# Altium PCB Arduino_ESP8266_SHT21_BH1750.PcbDoc
Units mm, origin at the board's own origin, x right, y up, seen from the top; angles counter-clockwise.
Board outline 48.85 x 51.82 mm, 2 copper layers (Top Layer, Bottom Layer); 10 components, 29 nets, 56 pads, 1 vias.
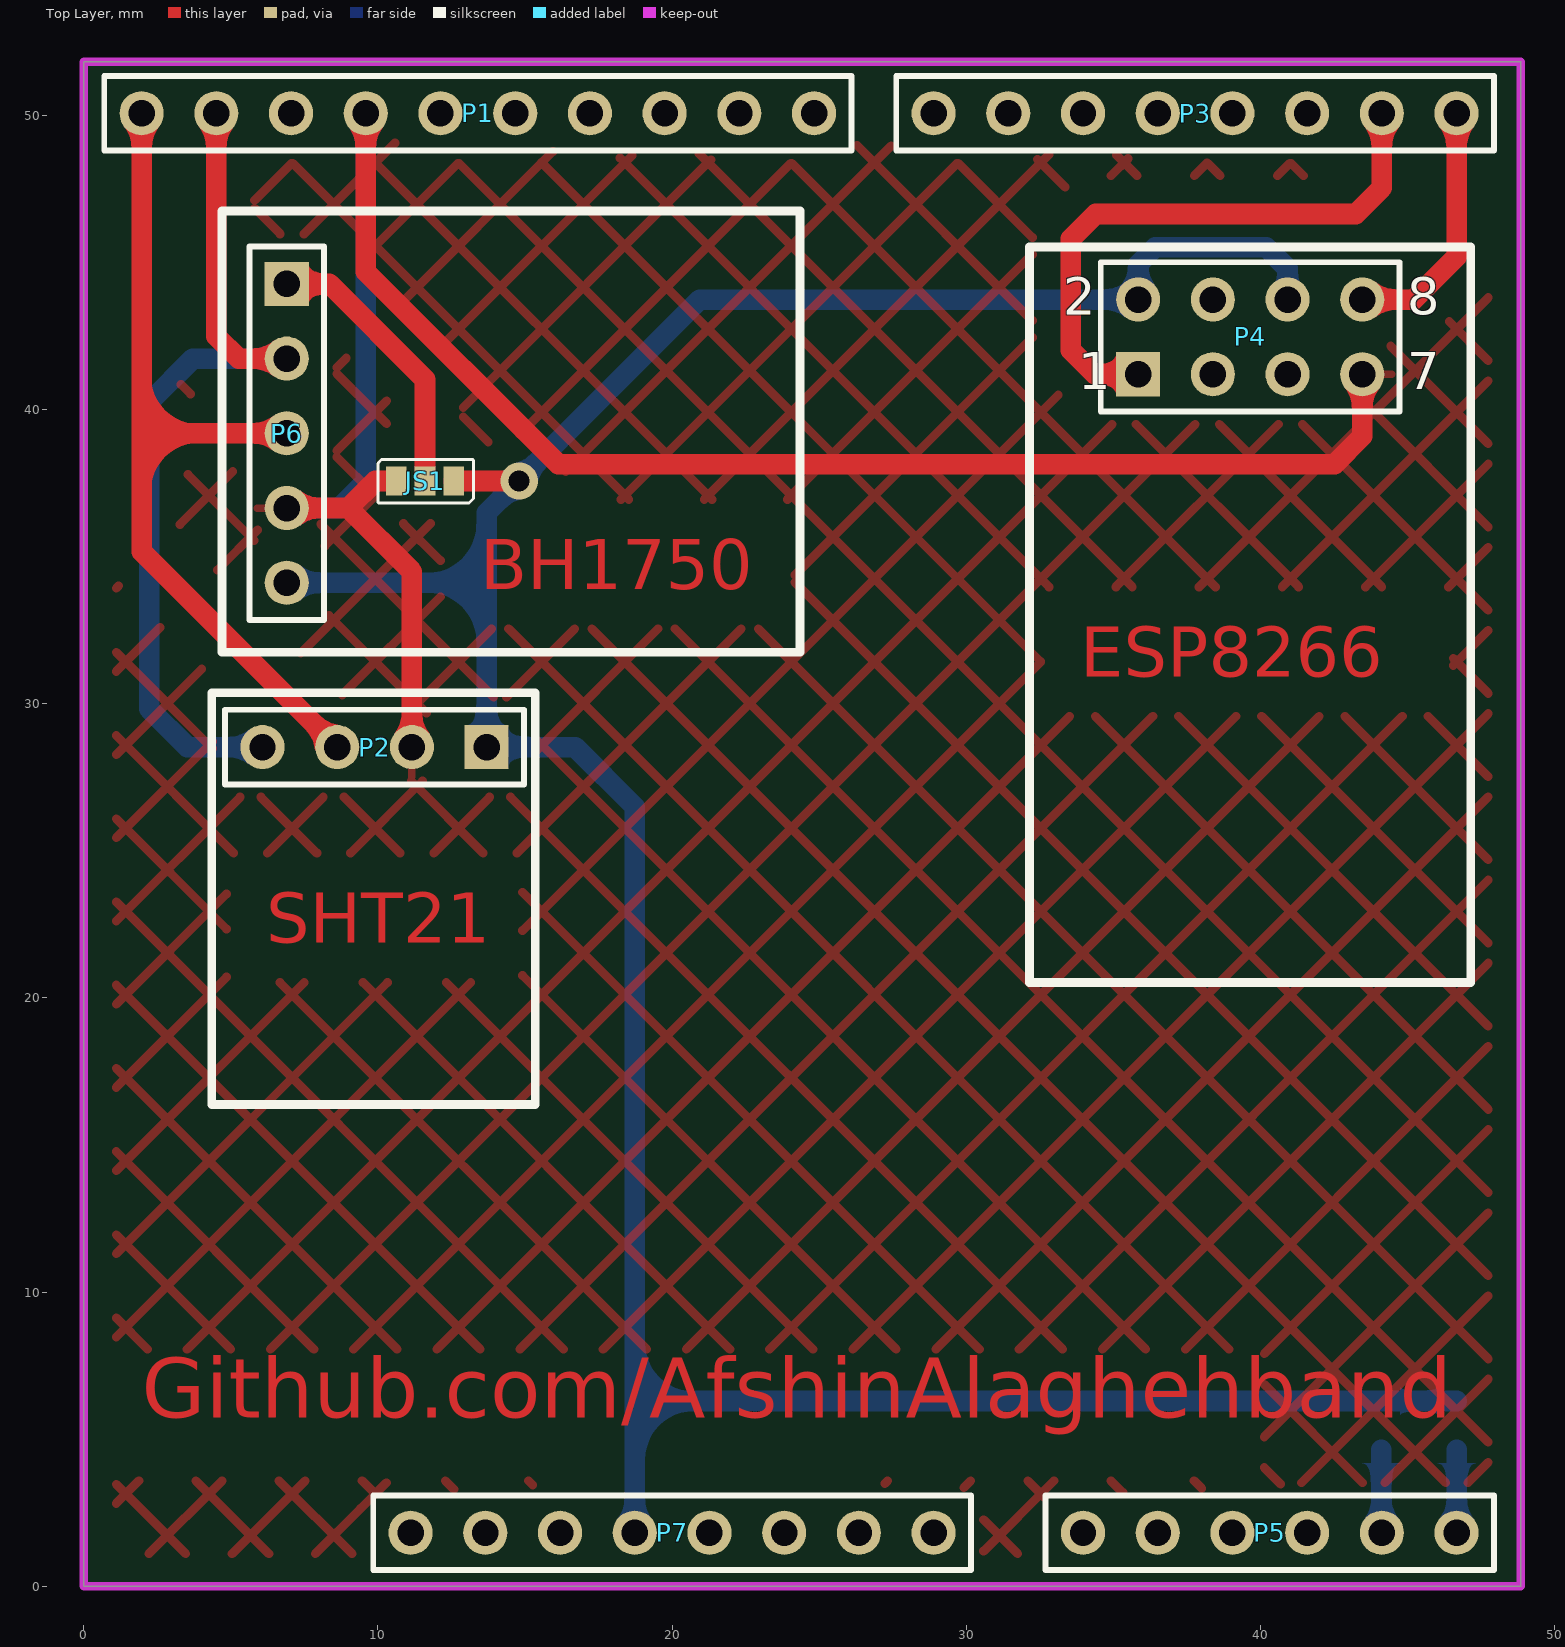
[diagram p0: Top Layer view]
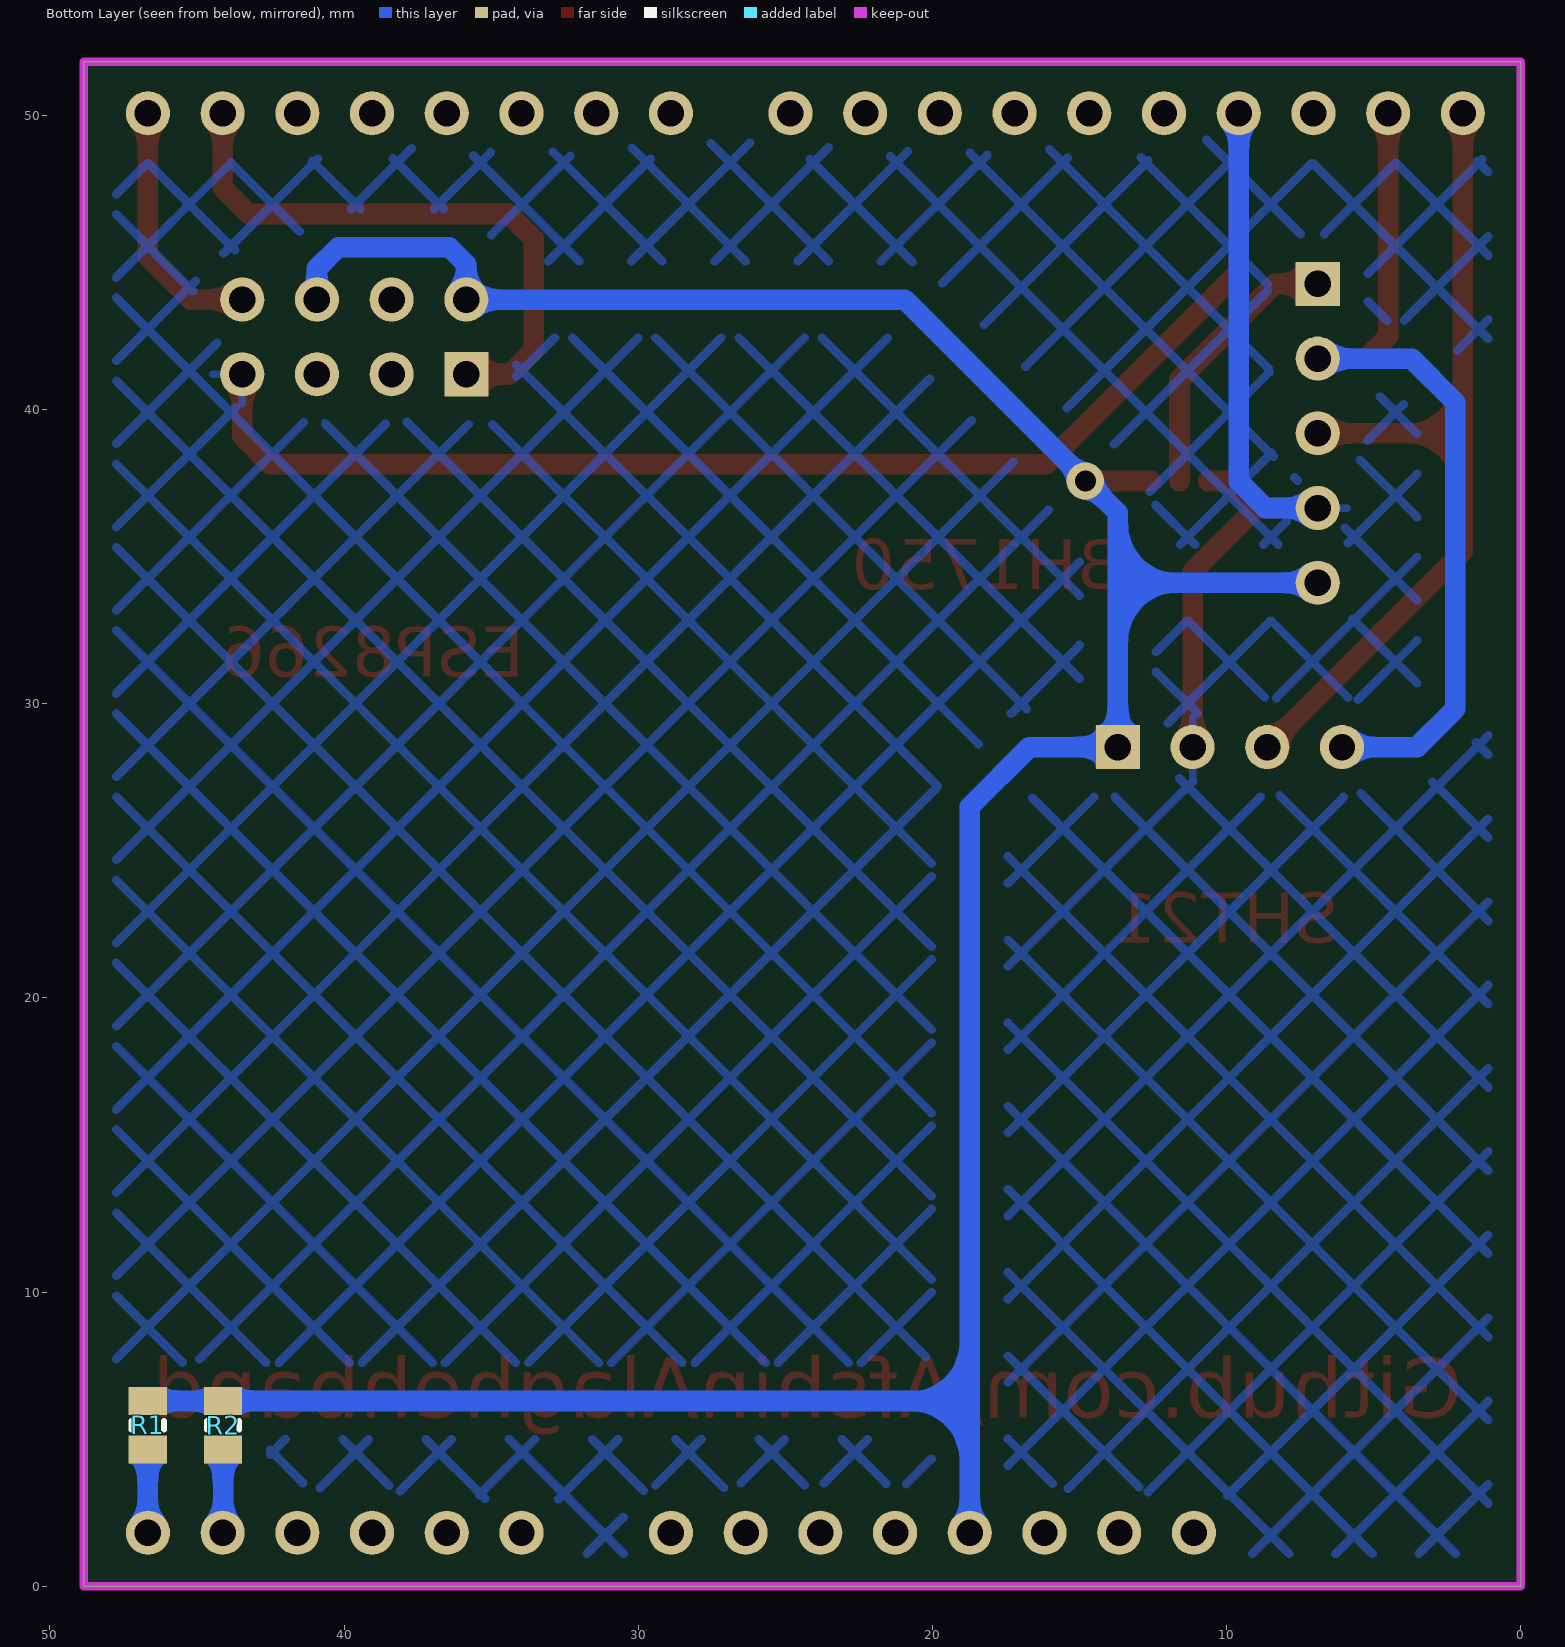
[diagram p1: Bottom Layer view, seen from below]

## Layer stack, top to bottom
Top Solder: solder mask 0.0102, Solder Resist, Dk 3.5
Top Layer: signal copper 0.0356
Dielectric 1: dielectric 0.32, FR-4, Dk 4.8
Bottom Layer: signal copper 0.0356
Bottom Solder: solder mask 0.0102, Solder Resist, Dk 3.5

## Board outline
0,0 0,51.825 48.85,51.825 48.85,0

## Design rules (kind name [scope] priority, off if disabled: settings)
Clearance Clearance_2 [InPolygon] p1: gap=0.8 ignorepadtopadclearanceinfootprint=FALSE except(0: Arc-Hole Track-Hole SMDPad-Hole THPad-Hole Via-Hole Fill-Hole Poly-Hole Region-Hole Text-Hole)
Clearance Clearance_1 [(OnLayer('Keep-Out Layer'))] p2: gap=0 ignorepadtopadclearanceinfootprint=FALSE
Clearance [All] p3: gap=0.2 ignorepadtopadclearanceinfootprint=FALSE except(0: Arc-Hole Track-Hole SMDPad-Hole THPad-Hole Via-Hole Fill-Hole Poly-Hole Region-Hole Text-Hole)
ComponentClearance [All] p1 off: gap=0.254 collisioncheckmode=3 verticalgap=0.254 showdistances=FALSE
HoleSize [All] p1: absolutevalues=TRUE maxlimit=5 minlimit=0.025 maxpercent=80.000 minpercent=20.000
MinimumSolderMaskSliver [All] p1 off: minsoldermaskwidth=0.254
PolygonConnect [All] p1: connectstyle=Relief reliefconductorwidth=0.254 reliefentries=4 polygonreliefangle="90 Angle" airgapwidth=0.254
RoutingVias [All] p1: holewidth=0.6 width=0.9 viastyle="Through Hole" minholewidth=0.5 minwidth=0.7 maxholewidth=1.5 maxwidth=1.8
SilkToSilkClearance [All] p1 off: silktosilkclearance=0.254
SilkToSolderMaskClearance [IsPad] p1 off: minsilkscreentomaskgap=0.254 clearancetoexposedcopper=TRUE
SolderMaskExpansion [All] p1: expansion=0.102
Width [All] p1: maxlimit=5 minlimit=0.1 preferedwidth=0.3
25 further rules are at their usual default settings.

## Components (designator, comment, footprint, x,y, rotation, side; value= is the part's Value field where it differs from the comment)
JS1 "JumperSMD 3Pin" "JumperSMD 3Pin - UltraSmall" 13.5,37.55 r90 top
P1 "Header 10" HDR1X10 24.826,50.077 r180 top
P2 "SHT21" HDR1X4 13.695,28.527 r180 top
P3 "Header 8" HDR1X8 46.67,50.077 r180 top
P4 "ESP8266" HDR2X4 35.845,41.202 r0 top
P5 "Header 6" HDR1X6 33.97,1.817 r0 top
P6 "BH1750" HDR1X5 6.9,44.275 r270 top
P7 "Header 8" HDR1X8 11.11,1.817 r0 top
R1 "3.3K" "RES 0805 (2012X06L)" 46.679,4.645 r90 bottom
R2 "3.3K" "RES 0805 (2012X06L)" 44.114,4.645 r90 bottom

## Footprints (in the part's own frame and the unit in brackets; to place one, negate y for a bottom-side part, rotate by r counter-clockwise, add the part's x,y. Pads: shape width x height; smd on the part's side, far side on the other; paste and mask are expansions set on the pad)
HDR1X4 [mm] "Connector; Header; 4 Position"
  rect 1.5x1.5 hole 0.9: 1(0,0)
  round 1.5 hole 0.9: 2(2.54,0) 3(5.08,0) 4(7.62,0)
  silkscreen extent -1.27,-1.27 8.89,1.27
HDR1X5 [mm] "Connector; Header; 5 Position"
  rect 1.5x1.5 hole 0.9: 1(0,0)
  round 1.5 hole 0.9: 2(2.54,0) 3(5.08,0) 4(7.62,0) 5(10.16,0)
  silkscreen extent -1.27,-1.27 11.43,1.27
HDR1X6 [mm] "Connector; Header; 6 Position"
  round 1.5 hole 0.9: 1(0,0) 2(2.54,0) 3(5.08,0) 4(7.62,0) 5(10.16,0) 6(12.7,0)
  silkscreen extent -1.27,-1.27 13.97,1.27
HDR1X8 [mm] "Connector; Header; 8 Position"
  round 1.5 hole 0.9: 1(0,0) 2(2.54,0) 3(5.08,0) 4(7.62,0) 5(10.16,0) 6(12.7,0) 7(15.24,0) 8(17.78,0)
  silkscreen extent -1.27,-1.27 19.05,1.27
HDR1X10 [mm] "Connector; Header; 10 Position"
  round 1.5 hole 0.9: 1(0,0) 2(2.54,0) 3(5.08,0) 4(7.62,0) 5(10.16,0) 6(12.7,0) 7(15.24,0) 8(17.78,0) 9(20.32,0) 10(22.86,0)
  silkscreen extent -1.27,-1.27 24.13,1.27
HDR2X4 [mm] "Connector; Header; 4x2 Position"
  rect 1.5x1.5 hole 0.9: 1(0,0)
  round 1.5 hole 0.9: 2(0,2.54) 3(2.54,0) 4(2.54,2.54) 5(5.08,0) 6(5.08,2.54) 7(7.62,0) 8(7.62,2.54)
  silkscreen extent -1.27,-1.27 8.89,3.81
"JumperSMD 3Pin - UltraSmall" [mm]
  rect 1x0.7 smd: 1(0.025,2.875) 2(0.025,1.9) 3(0.025,0.925)
  silkscreen extent -0.72,0.25 0.75,3.5
"RES 0805 (2012X06L)" [mm] "Chip Resistor, 2-Leads, Body 2.0x1.3mm, IPC High Density _ (0.100 W)"
  rect 0.95x1.3 smd: 1(0,0) 2(1.65,0)
  silkscreen extent 0.67,-0.55 0.97,0.55, body extent -0.19,-0.63 1.84,0.64, height 0.6

## Part data
P1: "Header, 10-Pin", LatestRevisionDate=17-Jul-2002, LatestRevisionNote="Re-released for DXP Platform.", Publisher="Altium Limited"
P2: library part "Header 4", "SHT21 temperature and humidity sensor", LatestRevisionDate=17-Jul-2002, LatestRevisionNote="Re-released for DXP Platform.", Publisher="Altium Limited"
P3 P7: "Header, 8-Pin", LatestRevisionDate=17-Jul-2002, LatestRevisionNote="Re-released for DXP Platform.", Publisher="Altium Limited"
P4: library part "Header 4X2", "ESP8266-01", LatestRevisionDate=17-Jul-2002, LatestRevisionNote="Re-released for DXP Platform.", Publisher="Altium Limited"
P5: "Header, 6-Pin", LatestRevisionDate=17-Jul-2002, LatestRevisionNote="Re-released for DXP Platform.", Publisher="Altium Limited"
P6: library part "Header 5", "BH1750 Ambient Light Sensor", LatestRevisionDate=17-Jul-2002, LatestRevisionNote="Re-released for DXP Platform.", Publisher="Altium Limited"
R1 R2: library part Resistor, "Resistor", Power="1/8 W", Tolerance=5%

## Via types
v1: diameter 1.27, hole 0.711, Top Layer to Bottom Layer, 1 vias

## Nets (pads, with @x,y where several pads share a name; then routed paths per layer and width w, separated by ;. In a path a pad name is that pad's centre, name@x,y a point inside that pad or via, vN(x,y) a via of type N, cw(c..) or ccw(c..) an arc to the next point about the centre after c; other vN are vias at no path point)
+3V3: JS1.3 P2.1 P4.2 P4.6 P6.5 P7.4 R1.2 R2.2 | length 108.5
  Top Layer w0.7: JS1.3 v1(14.8,37.575)
  Bottom Layer w0.7: P6.5 13.65,34.115 ; v1@14.787,37.587 13.695,36.495 P2.1 16.698,28.527 18.73,26.495 P7.4 ; v1(14.8,37.575) v1@14.825,37.6 ; v1@14.813,37.613 20.942,43.742 P4.2 35.845,44.945 36.425,45.525 40.2,45.525 40.925,44.8 P4.6 ; 18.77,6.245 18.82,6.295 R2.2 R1.2
+5V: P7.5
AD0: P5.1
AD1: P5.2
AD2: P5.3
AD3: P5.4
AD4: P5.5 R2.1 | length 2.8
  Bottom Layer w0.7: R2.1 44.114,1.833 P5.5
AD4/SDA: P1.9 P2.4 P6.2 | length 30.6
  Top Layer w0.7: P1.9 4.506,42.494 5.265,41.735 P6.2 ; P2.4@5.95,28.652 P2.4
  Bottom Layer w0.7: P2.4 3.523,28.527 2.225,29.825 2.225,40.25 3.71,41.735 P6.2
AD5: P5.6 R1.1 | length 2.8
  Bottom Layer w0.7: P5.6 46.679,1.826 R1.1
AD5/SCL: P1.10 P2.3 P6.3 | length 29.1
  Top Layer w0.7: P1.10 1.966,35.176 P2.3 ; 2.1,39.195 P6.3
AREF: P1.8
GND: JS1.1 P1.7 P2.2 P4.7 P6.4 | length 73.2
  Top Layer w0.7: P6.4 8.995,36.655 ; P1.7 9.586,44.689 16.125,38.15 42.525,38.15 43.465,39.09 P4.7 ; JS1.1 9.915,37.575 8.995,36.655 ; P2.2 11.155,34.495 8.995,36.655
  Bottom Layer w0.7: P6.4 8.68,36.655 9.586,37.561 P1.7
IO2: P3.3
IO3: P3.4
IO4: P3.5
IO5: P3.6
IO6: P3.7
IO7: P3.8
IO8: P1.1
IO9: P1.2
MISO/IO12: P1.5
MOSI/IO11: P1.4
NetJS1_2: JS1.2 P6.1 | length 9.5
  Top Layer w0.7: P6.1 8.35,44.275 11.6,41.025 JS1.2
RESET: P7.3
RX/IO0: P3.1 P4.8 | length 8.7
  Top Layer w0.7: P4.8 45.215,43.742 46.67,45.197 P3.1
SCK/IO13: P1.6
SS/IO10: P1.3
TX/IO1: P3.2 P4.1 | length 20.3
  Top Layer w0.7: P4.1 34.373,41.202 33.55,42.025 33.55,45.8 34.402,46.652 43.245,46.652 44.13,47.537 P3.2
Vin: P7.8
pads on no net: P4.3 P4.4 P4.5 P7.1 P7.2 P7.6 P7.7

## Polygon pours and split planes (outlines as drawn)
GND on Bottom Layer "Bottom Layer-No Net" (hatched 45Degree grid 2 track 0.3, pour order 0): 48.85,51.825 0,51.825 0,0 48.85,0
GND on Top Layer "Bottom Layer-No Net" (hatched 45Degree grid 2 track 0.3, pour order 2): 48.85,51.825 0,51.825 0,0 48.85,0

## Keep-outs
Keep-Out Layer:
  the board outline again, w0.3

## Other copper
Top Layer:
  region net AD5/SCL: 3.925,39.5 cw(c3.925,41.15) 2.275,41.15 2.275,39.5
  region net AD5/SCL: 2.275,37.225 cw(c3.925,37.225) 3.925,38.875 2.275,38.875
  text "BH1750" at 13.475,33.9 h1.7
  text "ESP8266" at 33.875,30.925 h1.7
  text "SHT21" at 6.2,21.875 h1.7
  text "Github.com/AfshinAlaghehband" at 1.966,5.05 h3.5
Bottom Layer:
  region net +3V3: 13.35,36.1 cw(c11.7,36.1) 11.7,34.45 13.35,34.45
  region net +3V3: 11.7,33.775 cw(c11.7,32.125) 13.35,32.125 13.35,33.775
  region net +3V3: 19.075,4.3 cw(c20.725,4.3) 20.725,5.95 19.075,5.95
  region net +3V3: 20.725,6.625 cw(c20.725,8.275) 19.075,8.275 19.075,6.625

## Silkscreen, mask and mechanical layers (free items; w line width, h text height)
Top Overlay:
  lines w0.3: 4.35,16.375 4.35,30.375 15.35,30.375 15.35,16.375 4.35,16.375 ; 4.7,31.75 4.7,46.75 24.35,46.75 24.35,31.75 4.7,31.75 ; 32.15,20.525 47.15,20.525 47.15,45.525 32.15,45.525 32.15,20.525

## Text inside footprints (layer, text, board x,y; h text height)
P4: Top Overlay "2" at 33.305,43.234 h1.27; Top Overlay "1" at 33.813,40.694 h1.27; Top Overlay "7" at 44.989,40.694 h1.27; Top Overlay "8" at 44.989,43.234 h1.27